# Altium PCB Mashiro FS (release).PcbDoc
Units mm, origin at the board's own origin, x right, y up, seen from the top; angles counter-clockwise.
Board outline 80 x 50 mm, 4 copper layers (Top Layer, Layer 1, Layer 2, Bottom Layer), stack 1.57 mm thick; 62 components, 49 nets, 197 pads, 898 vias.
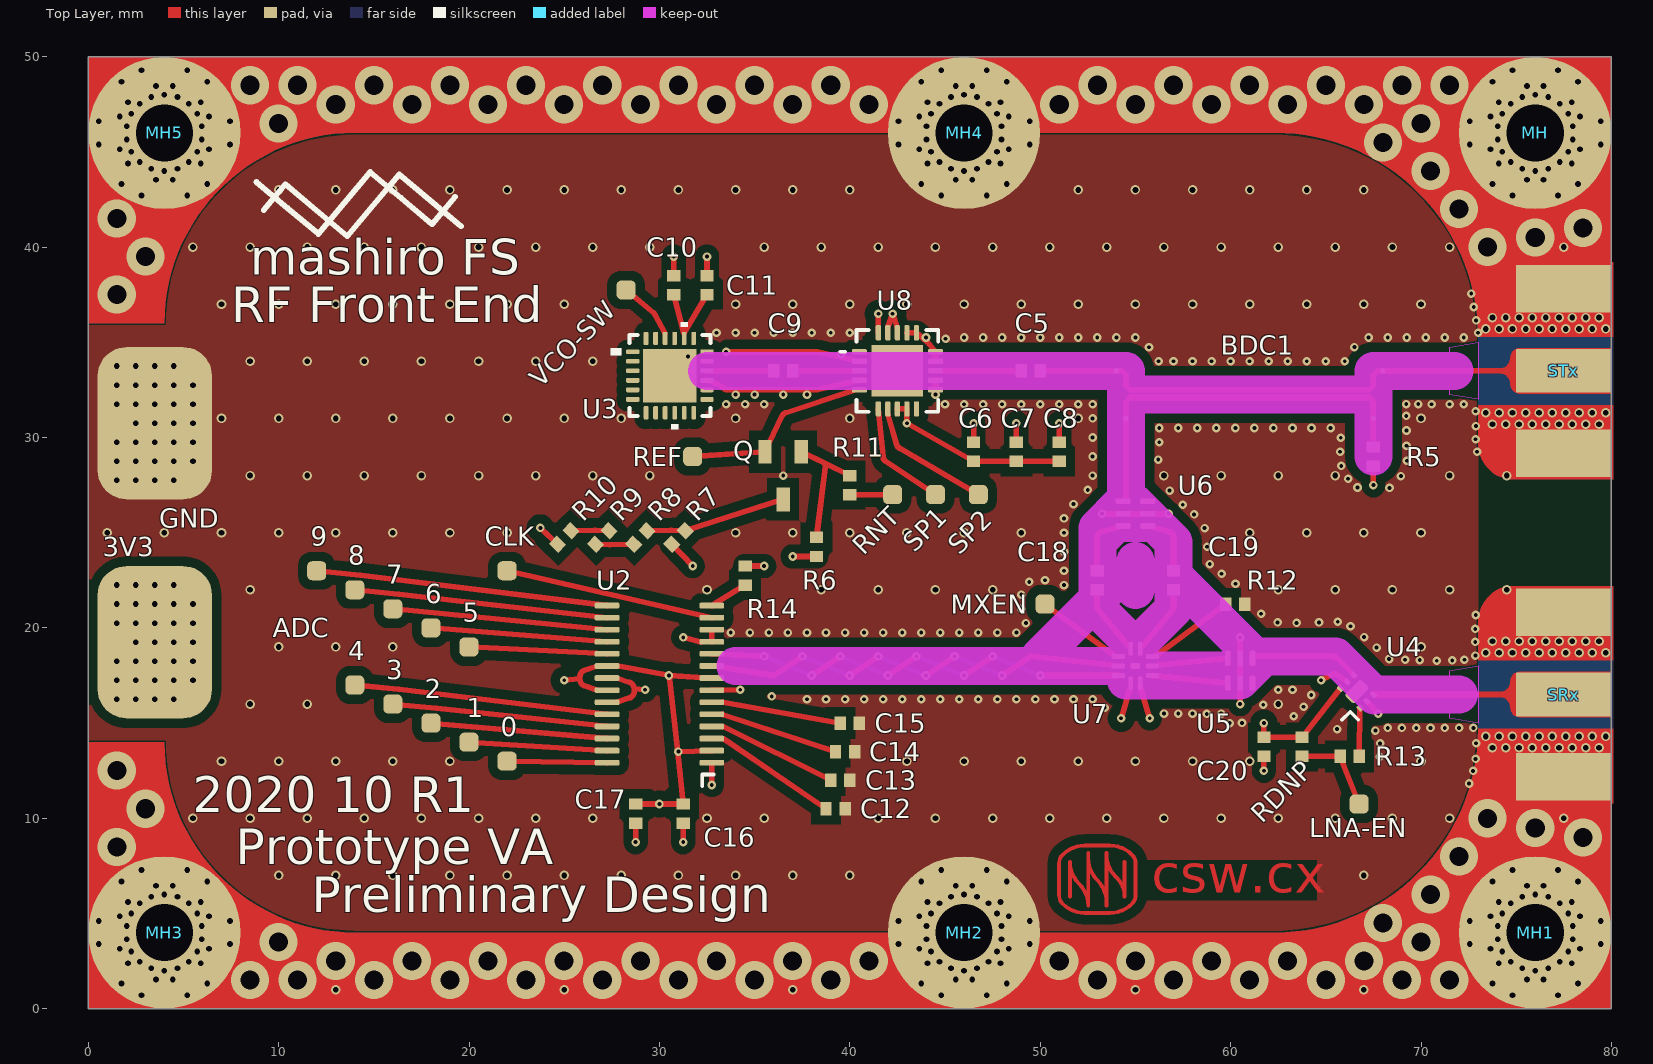
[diagram p0: Top Layer view]
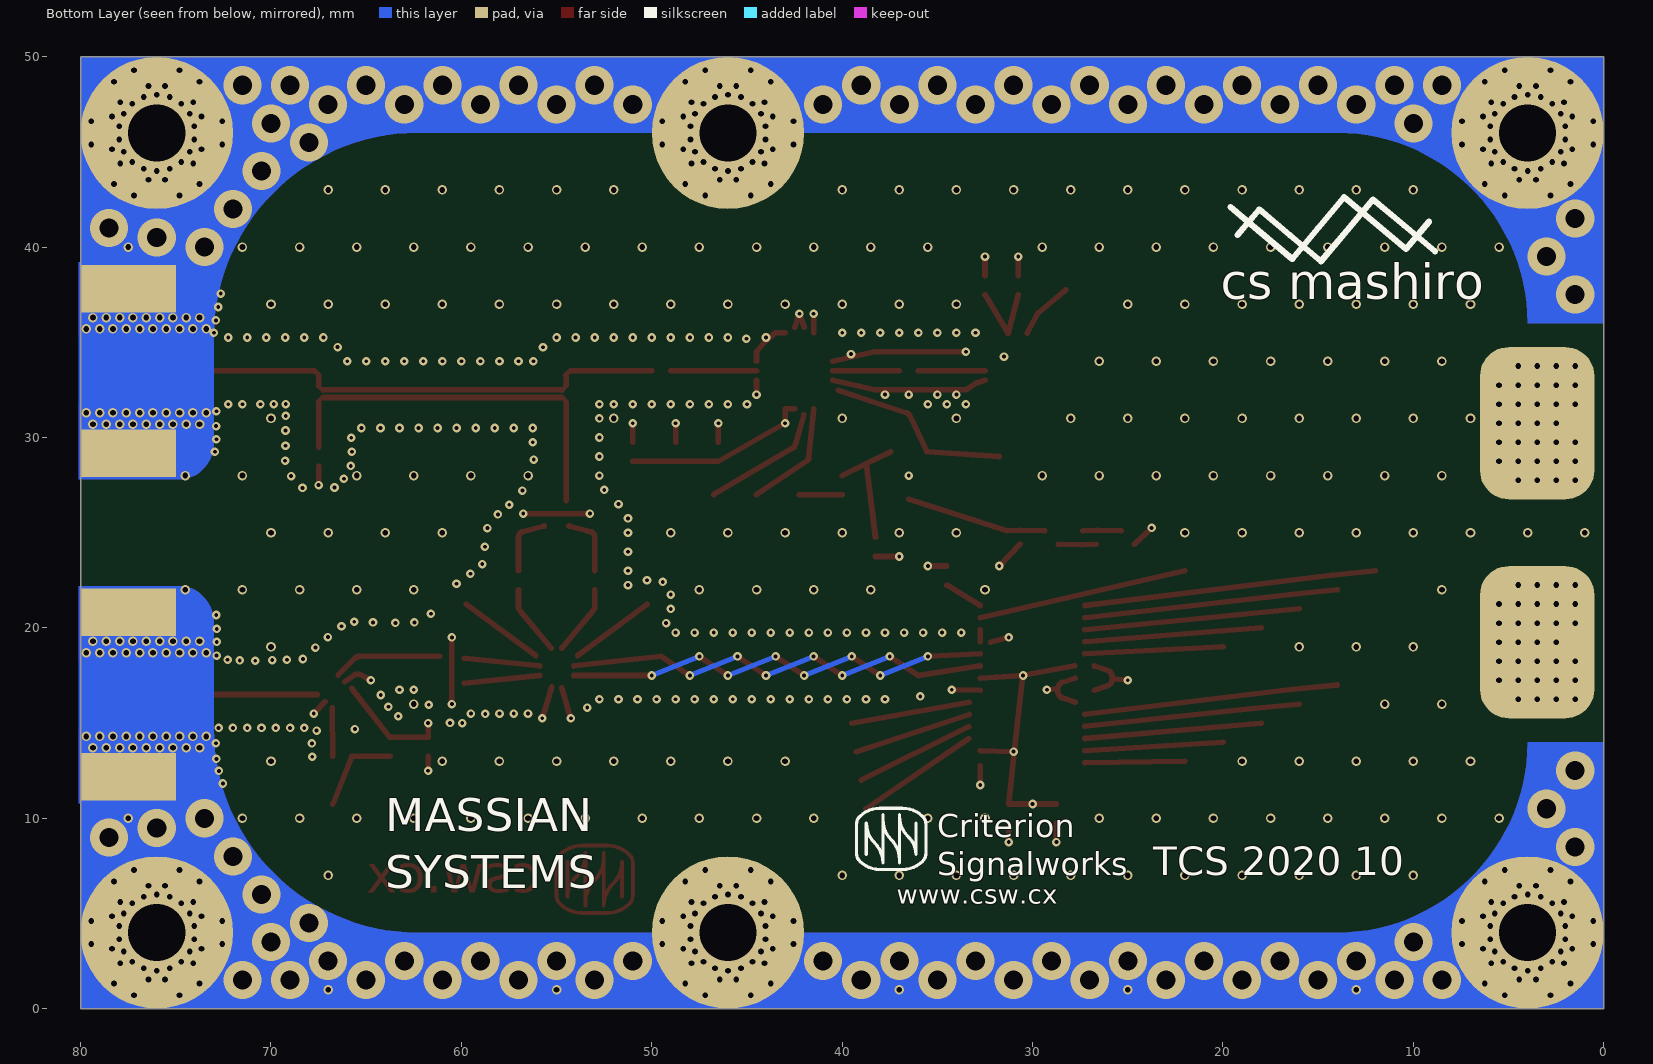
[diagram p1: Bottom Layer view, seen from below]
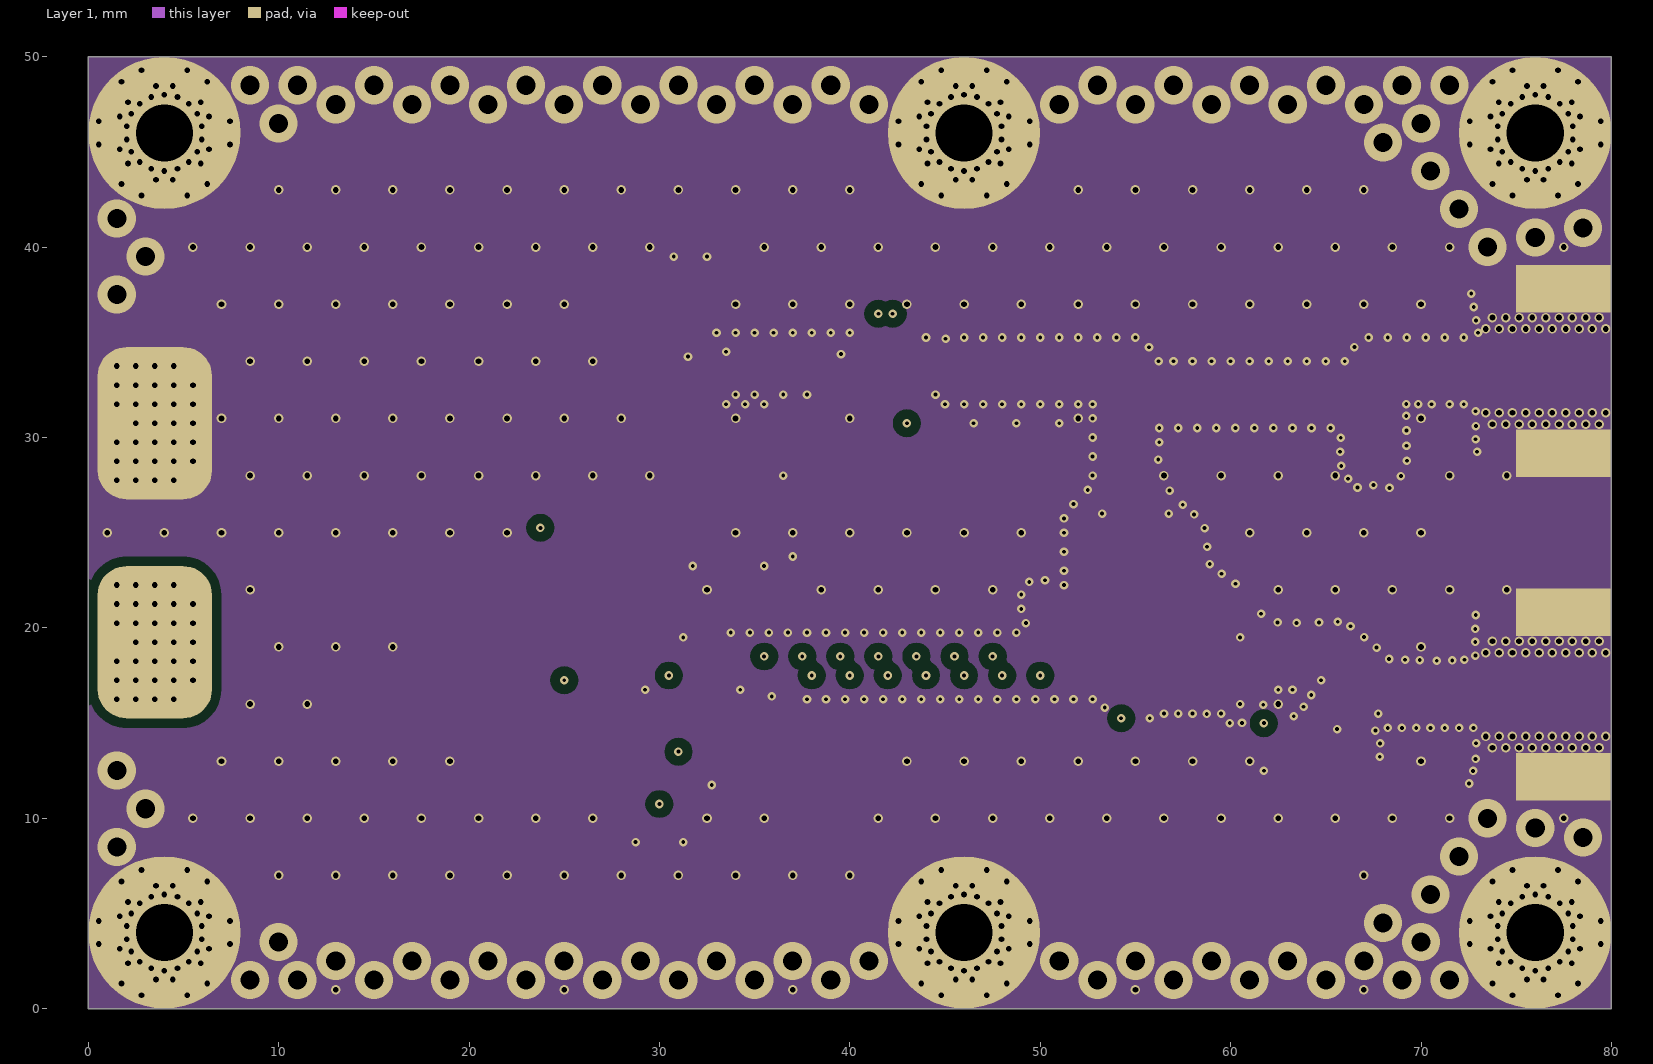
[diagram p2: Layer 1]
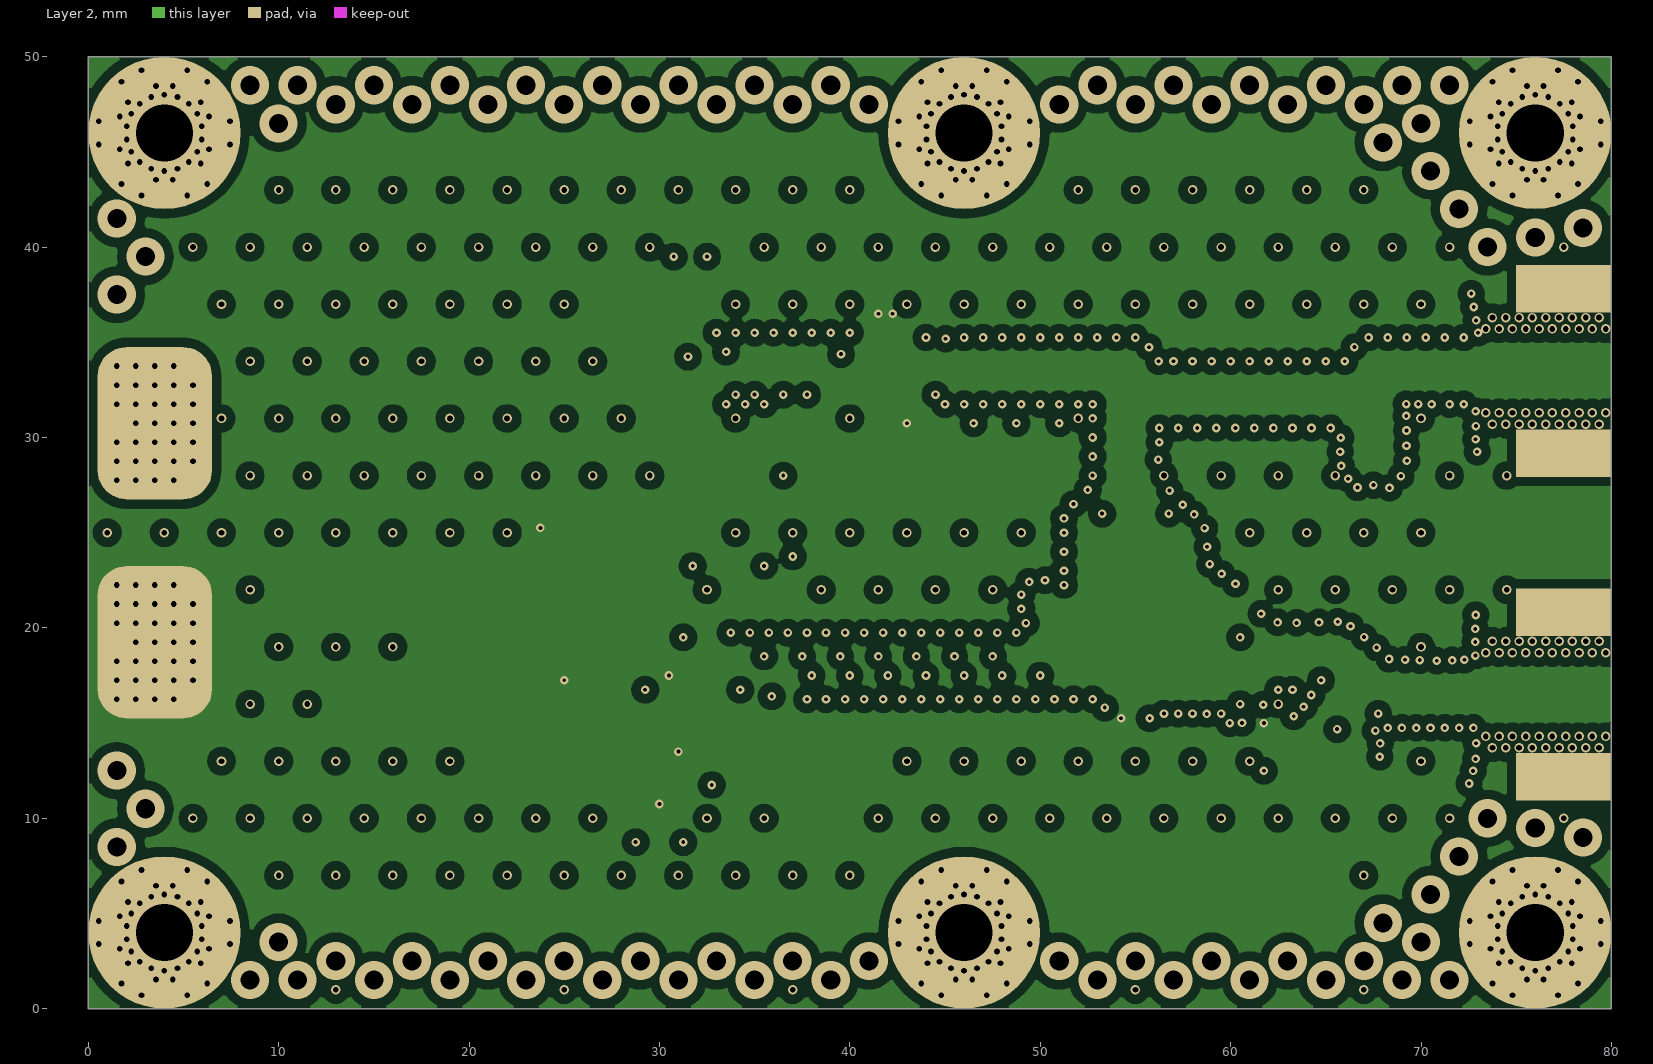
[diagram p3: Layer 2]

## Layer stack, top to bottom
Top Solder: solder mask 0.0254, SM-001, Dk 4
Top Layer: signal copper 0.035
Dielectric 2: prepreg 0.2, PP-006, Dk 4.1
Layer 1: signal copper 0.0175
Dielectric 1: core 1.065, Core-043, Dk 4.3
Layer 2: signal copper 0.0175
Dielectric 3: prepreg 0.2, PP-006, Dk 4.1
Bottom Layer: signal copper 0.035
Bottom Solder: solder mask 0.0254, SM-001, Dk 4

## Board outline
0,0 80,0 80,50 0,50

## Design rules (kind name [scope] priority, off if disabled: settings)
Clearance [All] p1: gap=0.127 ignorepadtopadclearanceinfootprint=FALSE except(0.09: Arc-Arc Arc-Track Track-Track Fill-Fill Fill-Poly Fill-Region Poly-Poly Poly-Region Region-Region; 0.5: Arc-Fill Arc-Poly Arc-Region Track-Fill Track-Poly Track-Region SMDPad-Fill SMDPad-Poly SMDPad-Region THPad-Fill THPad-Poly THPad-Region Via-Fill Via-Poly Via-Region)
HoleSize [All] p1: absolutevalues=TRUE maxlimit=6.3 minlimit=0.2 maxpercent=80.000 minpercent=20.000
MinimumAnnularRing [All] p1: minimumring=0.13
PlaneClearance [All] p1: clearance=0
PlaneConnect [All] p1: planeconnectstyle=Direct reliefexpansion=0.5 reliefentries=4 reliefconductorwidth=0.3 reliefairgap=0.3
PolygonConnect [All] p1: connectstyle=Direct reliefconductorwidth=0.3 reliefentries=4 polygonreliefangle="45 Angle" airgapwidth=0.3
RoutingVias [All] p1: holewidth=0.711 width=1.27 viastyle="Through Hole" minholewidth=0.711 minwidth=1.27 maxholewidth=0.711 maxwidth=1.27
SolderMaskExpansion [All] p1: expansion=0.102 istentingtop=FALSE
UnRoutedNet [All] p1: checkbadconnections=TRUE
Width [All] p1: maxlimit=50 minlimit=0.127 preferedwidth=0.254 toplayer_prefwidth=0.25 midlayer1_minwidth=0.254 midlayer1_maxwidth=0.254 midlayer2_minwidth=0.254 midlayer2_maxwidth=0.254 bottomlayer_prefwidth=0.25 minimp=50.000000 maximp=50.000000 favimp=50.000000
26 further rules are at their usual default settings.

## Components (designator, comment, footprint, x,y, rotation, side; value= is the part's Value field where it differs from the comment)
0 "CS-TP-1mm" CS-TP-1mm 22,13 r90 top (schematic designator ADC-D0)
1 "CS-TP-1mm" CS-TP-1mm 20,14 r90 top (schematic designator ADC-D1)
2 "CS-TP-1mm" CS-TP-1mm 18,15 r90 top (schematic designator ADC-D2)
3 "CS-TP-1mm" CS-TP-1mm 16,16 r90 top (schematic designator ADC-D3)
4 "CS-TP-1mm" CS-TP-1mm 14,17 r90 top (schematic designator ADC-D4)
5 "CS-TP-1mm" CS-TP-1mm 20,19 r90 top (schematic designator ADC-D5)
6 "CS-TP-1mm" CS-TP-1mm 18,20 r90 top (schematic designator ADC-D6)
7 "CS-TP-1mm" CS-TP-1mm 16,21 r90 top (schematic designator ADC-D7)
8 "CS-TP-1mm" CS-TP-1mm 14,22 r90 top (schematic designator ADC-D8)
9 "CS-TP-1mm" CS-TP-1mm 12,23 r90 top (schematic designator ADC-D9)
BDC1 "CS-RF-BDC-5.8" CS-RF-BDC01 54,33.5 r0 top net-tie
C5 "1nF" CS-0402! 49.5,33.5 r0 top
C6 "1uF" CS-0402! 46.5,29.25 r90 top
C7 "10nF" CS-0402! 48.75,29.25 r90 top
C8 "1nF" CS-0402! 51,29.25 r90 top
C9 "1nF" CS-0402! 36.5,33.5 r0 top
C10 "10nF" CS-0402! 30.75,38 r90 top
C11 "1uF" CS-0402! 32.5,38 r90 top
C12 "100nF" CS-0402! 39.25,10.5 r180 top
C13 "100nF" CS-0402! 39.5,12 r180 top
C14 "100nF" CS-0402! 39.75,13.5 r180 top
C15 "100nF" CS-0402! 40,15 r180 top
C16 "1uF" CS-0402! 31.25,10.25 r90 top
C17 "10nF" CS-0402! 28.75,10.25 r90 top
C18 "1nF" CS-0402! 53,22.5 r90 top
C19 "1nF" CS-0402! 57,22.5 r90 top
C20 "100nF" CS-0402! 61.75,13.75 r270 top
CLK "CS-TP-1mm" CS-TP-1mm 22,23 r90 top (schematic designator ADC-CLK)
LNA-EN "CS-TP-1mm" CS-TP-1mm 66.75,10.75 r90 top
MH "CS-MH-M3" CS-MH-M3 76,46 r0 top (schematic designator *?)
MH1 "CS-MH-M3" CS-MH-M3 76,4 r0 top (schematic designator *)
MH2 "CS-MH-M3" CS-MH-M3 46,4 r0 top (schematic designator *)
MH3 "CS-MH-M3" CS-MH-M3 4,4 r0 top (schematic designator *)
MH4 "CS-MH-M3" CS-MH-M3 46,46 r0 top (schematic designator *?)
MH5 "CS-MH-M3" CS-MH-M3 4,46 r0 top (schematic designator *?)
MXEN "CS-TP-1mm" CS-TP-1mm 50.25,21.25 r90 top (schematic designator MX-EN)
Q "DSS4240T" SOT-23-3 36.5,28 r90 top
R5 "50" CS-0402! 67.5,29 r270 top
R6 "100k" CS-0402! 38.25,24.25 r270 top
R7 "100k" CS-0402! 31,24.75 r225 top
R8 "10k" CS-0402! 29,24.75 r45 top
R9 "4.7k" CS-0402! 27,24.75 r45 top
R10 "1k" CS-0402! 25,24.75 r45 top
R11 "100" CS-0402! 40,27.5 r90 top
R12 "100" CS-0402! 60.25,21.25 r0 top
R13 "100" CS-0402! 66.25,13.25 r0 top
R14 "10k" CS-0402! 34.5,22.75 r90 top
RDNP "0" CS-0402! 63.75,13.75 r270 top
REF "CS-TP-1mm" CS-TP-1mm 31.75,29 r90 top (schematic designator PA-REF)
RNT "CS-TP-1mm" CS-TP-1mm 42.25,27 r90 top (schematic designator PA-RN-T)
SP1 "CS-TP-1mm" CS-TP-1mm 44.5,27 r90 top (schematic designator PA-SP1)
SP2 "CS-TP-1mm" CS-TP-1mm 46.75,27 r90 top (schematic designator PA-SP2)
SRx "CS-RF-SMA" CS-RF-SMA 77.5,16.5 r90 top
STx "CS-RF-SMA" CS-RF-SMA 77.5,33.5 r90 top
U2 "MAX1426" SSOP-28 30,17.047 r180 top
U3 "HMC431LP4E" "QFN-24 (HMC431LP4)" 30.55,33.25 r0 top
U4 "SKY65404" QFN-6 66.634,16.659 r45 top
U5 "HHM1595A1" 0805-6 60.5,17.75 r270 top
U6 "HHM1595A1" 0805-6 55,26 r0 top
U7 "LTC5562" "QFN-10 (Legacy LTC)" 55,18 r270 top
U8 "SE5004L" QFN-20 42.5,33.5 r270 top
VCO-SW "CS-TP-1mm" CS-TP-1mm 28.25,37.75 r90 top

## Footprints (in the part's own frame and the unit in brackets; to place one, negate y for a bottom-side part, rotate by r counter-clockwise, add the part's x,y. Pads: shape width x height; smd on the part's side, far side on the other; paste and mask are expansions set on the pad)
0805-6 [mm]
  rrect50% 0.8x0.3 smd: 1(-0.65,0.65) 2(-0.65,0) 3(-0.65,-0.65) 4(0.65,-0.65) 5(0.65,0) 6(0.65,0.65)
  body extent -0.65,-0.85 0.6,0.9, height 1
CS-0402! [mm] "1005(0402) Medium/perfect density, cap varient for general purpose"
  rect 0.6x0.7 smd: 1(-0.5,0) 2(0.5,0)
  body extent -0.5,-0.25 0.5,0.25, height 0.4
CS-MH-M3 [mm]
  round 8 hole 3: 1(0,0)
CS-RF-BDC01 [mm] "Backward directional coupler, 5.8GHz, 50 ohms, for JLC7628 stackup"
  round 0.293 smd paste-10 mask+0.102: 1(0,0) 2(14,0) 3(13.5,-2.5) 4(0.5,-2.5)
  Top Layer region: 0.75,-1.546 0.647,-1.546 0.647,-1.65 0.646,-1.65 0.355,-1.65 0.354,-1.649 0.354,-1.588 0.689,-1.253 0.75,-1.253 0.75,-1.4
  Top Layer region: 13.25,-1.546 13.353,-1.546 13.353,-1.65 13.354,-1.65 13.645,-1.65 13.646,-1.649 13.646,-1.588 13.311,-1.253 13.25,-1.253 13.25,-1.4
  Top Layer region: 0.75,-0.854 0.647,-0.854 0.647,-0.75 0.646,-0.75 0.355,-0.75 0.354,-0.751 0.354,-0.812 0.689,-1.147 0.75,-1.147 0.75,-1
  Top Layer region: 13.25,-0.854 13.353,-0.854 13.353,-0.75 13.354,-0.75 13.645,-0.75 13.646,-0.751 13.646,-0.812 13.311,-1.147 13.25,-1.147 13.25,-1
  Top Layer region: 0.354,-0.25 0.354,-0.147 0.25,-0.147 0.25,-0.146 0.25,0.145 0.251,0.146 0.312,0.146 0.647,-0.189 0.647,-0.25 0.5,-0.25
  Top Layer region: 13.646,-0.25 13.646,-0.147 13.75,-0.147 13.75,-0.146 13.75,0.145 13.749,0.146 13.688,0.146 13.353,-0.189 13.353,-0.25 13.5,-0.25
  Top Layer lines w0.293: 0,0 0.25,0 ; 0.5,-2.5 0.5,-1.65 ; 0.5,-0.75 0.5,-0.5 0.5,-0.25 ; 0.75,-1.4 1,-1.4 13,-1.4 13.25,-1.4 ; 0.75,-1 1,-1 13,-1 13.25,-1 ; 13.5,-2.5 13.5,-1.65 ; 13.5,-0.75 13.5,-0.5 13.5,-0.25 ; 13.75,0 14,0
CS-RF-SMA [mm]
  rect 2.3x5 smd paste-10: 1(0,0)
  rect 2.5x5 all layers, no hole: 2(-4.318,0) 2(4.318,0)
  Top Layer region: 1.8,-2.6 5.7,-2.6 5.7,2.693 5.57,3.346 5.2,3.9 5.2,3.9 4.535,4.344 3.751,4.5 3.751,4.5 1.8,4.5
  Top Layer region: 0,3.6 0,-2.5 -1.2,-2.5 -1.2,2.3 -1.162,2.491 -1.054,2.654 -0.891,2.762 -0.7,2.8 -0.7,2.8 -0.483,2.843 -0.299,2.966 -0.176,3.15 -0.133,3.367 -0.133,3.367 -0.133,3.6
  Top Layer region: 0,3.6 0,-2.5 1.2,-2.5 1.2,2.3 1.162,2.491 1.054,2.654 0.891,2.762 0.7,2.8 0.7,2.8 0.483,2.843 0.299,2.966 0.176,3.15 0.133,3.367 0.133,3.367 0.133,3.6
  Top Layer region: -1.8,-2.6 -5.7,-2.6 -5.7,2.693 -5.57,3.346 -5.2,3.9 -5.2,3.9 -4.535,4.344 -3.751,4.5 -3.751,4.5 -1.8,4.5
  Top Layer lines w0.293: 0,4 0,2.4
  Bottom Layer region: -1.8,-2.6 -5.7,-2.6 -5.7,2.693 -5.57,3.346 -5.2,3.9 -5.2,3.9 -4.535,4.344 -3.751,4.5 -3.751,4.5 -1.8,4.5
  Bottom Layer region: 1.8,-2.6 5.7,-2.6 5.7,2.693 5.57,3.346 5.2,3.9 5.2,3.9 4.535,4.344 3.751,4.5 3.751,4.5 1.8,4.5
  Bottom Layer region: -1.8,4.5 1.8,4.5 1.8,-2.6 -1.8,-2.6
  body extent -4.76,-12.24 4.76,2.03, height 4.32
CS-TP-1mm [mm] "Breakout pad"
  rrect50% 1x1 smd paste-2: 1(0,0)
QFN-6 [mm]
  rrect50% 0.25x0.35 smd: 1(-0.5,-0.725) 2(0,-0.725) 3(0.5,-0.725) 4(0.5,0.725) 5(0,0.725) 6(-0.5,0.725)
  rrect50% 1.2x0.7 smd: 7(0,0)
  silkscreen extent -1.6,-1.1 -1,-0.5, body extent -0.7,-0.6 0.7,0.6, height 0.7
"QFN-10 (Legacy LTC)" [mm]
  rrect50% 0.7x0.25 smd: 1(-0.9,0.25) 2(-0.9,-0.25) 6(0.9,-0.25) 7(0.9,0.25)
  rrect50% 0.25x0.7 smd: 3(-0.5,-0.9) 4(0,-0.9) 5(0.5,-0.9) 8(0.5,0.9) 9(0,0.9) 10(-0.5,0.9)
  rrect50% 0.3x0.5 smd: 11(0,0)
  body extent -1,-1 1,1, height 0.5
QFN-20 [mm]
  rrect50% 0.28x0.796 smd: 1(-1,-2) 2(-0.5,-2) 3(0,-2) 4(0.5,-2) 5(1,-2) 11(1,2) 12(0.5,2) 13(0,2) 14(-0.5,2) 15(-1,2)
  rrect50% 0.796x0.28 smd: 6(2,-1) 7(2,-0.5) 8(2,0) 9(2,0.5) 10(2,1) 16(-2,1) 17(-2,0.5) 18(-2,0) 19(-2,-0.5) 20(-2,-1)
  rect 2.7x2.7 smd: 21(0,0)
  silkscreen extent -2.15,-3 2.15,2.15, body extent -1.75,-1.75 1.75,1.75, height 0.4
"QFN-24 (HMC431LP4)" [mm]
  rrect50% 0.7x0.25 smd: 1(-1.95,1.25) 2(-1.95,0.75) 3(-1.95,0.25) 4(-1.95,-0.25) 5(-1.95,-0.75) 6(-1.95,-1.25) 13(1.95,-1.25) 14(1.95,-0.75) 15(1.95,-0.25) 16(1.95,0.25) 17(1.95,0.75) 18(1.95,1.25)
  rrect50% 0.25x0.7 smd: 7(-1.25,-1.95) 8(-0.75,-1.95) 9(-0.25,-1.95) 10(0.25,-1.95) 11(0.75,-1.95) 12(1.25,-1.95) 19(1.25,1.95) 20(0.75,1.95) 21(0.25,1.95) 22(-0.25,1.95) 23(-0.75,1.95) 24(-1.25,1.95)
  rect 2.8x2.8 smd: 25(0,0)
  silkscreen extent -3.11,-2.81 2.13,2.81, body extent -1.75,-1.75 1.75,1.75, height 0.4
SOT-23-3 [mm]
  rect 1.25x0.7 smd: 1(1.25,-0.95) 2(1.25,0.95) 3(-1.25,0)
  body extent -0.69,-1.5 0.69,1.5, height 1
SSOP-28 [mm]
  rrect50% 1.3x0.3 smd: 1(-2.75,4.128) 2(-2.75,3.492) 3(-2.75,2.857) 4(-2.75,2.222) 5(-2.75,1.587) 6(-2.75,0.952) 7(-2.75,0.317) 8(-2.75,-0.318) 9(-2.75,-0.953) 10(-2.75,-1.588) 11(-2.75,-2.222) 12(-2.75,-2.858) 13(-2.75,-3.492) 14(-2.75,-4.127) 15(2.75,-4.127) 16(2.75,-3.492) 17(2.75,-2.858) 18(2.75,-2.222) 19(2.75,-1.587) 20(2.75,-0.952) 21(2.75,-0.317) 22(2.75,0.318) 23(2.75,0.953) 24(2.75,1.588) 25(2.75,2.223) 26(2.75,2.858) 27(2.75,3.492) 28(2.75,4.127)
  silkscreen extent -2.85,4.75 -2.25,5.35, body extent -2.5,-4.5 2.5,4.5, height 0.5

## Part data
C5 C6 C7 C8 C9 C10 C11 C12 C13 C14 C15 C16 C17 C18 C19 C20: library part C0402!
R5 R6 R7 R8 R9 R10 R11 R12 R13 R14 RDNP: library part R0402!
U3: Built_By=EMA_UL_Team, Copyright="Copyright (C) 2018 Accelerated Designs. All rights reserved", Manufacturer_Part_Number=HMC431LP4E, RefDes=RefDes, SourceLibrary=Analog_2015-12-15, Type=DEV, Vendor="Analog Devices Inc"

## Free pads (board coordinates)
  rrect50% 6x8 all layers, no hole: 5(3.5,19.25) 5(3.5,30.75)

## Via types
v1: diameter 0.5, hole 0.3, Top Layer to Bottom Layer, 328 vias
v2: diameter 0.45, hole 0.2, Top Layer to Bottom Layer, tented both sides, 247 vias
v3: diameter 0.5, hole 0.3, Top Layer to Bottom Layer, tented both sides, 245 vias
v4: diameter 2, hole 1, Top Layer to Bottom Layer, tented both sides, 78 vias

## Nets (pads, with @x,y where several pads share a name; then routed paths per layer and width w, separated by ;. In a path a pad name is that pad's centre, name@x,y a point inside that pad or via, vN(x,y) a via of type N, cw(c..) or ccw(c..) an arc to the next point about the centre after c; other vN are vias at no path point)
3V0A: C10.1 C11.1 U3.20 | length 4.4
  Top Layer w0.293: C10.1 31.288,35.48 U3.20@31.29,35.473 ; U3.20@31.299,35.483 C11.1
3V3A: C6.1 C7.1 C8.1 C16.2 C17.2 C20.1 pad.5@3.5,19.25 R10.1 RDNP.1 U2.2 U2.8 U2.20 U2.22 U4.6 U7.6 U8.8 U8.9 U8.18 U8.19 U8.20 | length 40.6
  Top Layer w0.293: v2(23.75,25.25) R10.1 ; v2(25,17.25) 25.789,17.318 ; U2.22@26.75,16.73 26.064,16.959 cw(c26.175,17.29) 25.826,17.29 25.826,17.44 cw(c26.175,17.44) 26.065,17.771 U2.20@26.75,18 ; U2.20@27.784,18.015 30.482,17.503 ccw(c30.536,17.792) v2@30.519,17.499 ; C17.2 C16.2 v2@30.953,13.495 ; U2.2 v2@30.953,13.495 ; U2.8 v2@30.519,17.499 ; U8.20 v2(41.5,36.5) ; U8.19@41.994,35.796 v2(42.25,36.5) U8.18@42.482,35.796 ; U8.8 U8.9 v2(43,30.75) C6.1 C7.1 C8.1 ; v2(54.25,15.25) U7.6@54.725,16.855 ; v2(61.75,15) C20.1 RDNP.1 U4.6 ; v2@30.519,17.499 v2@30.953,13.495
  other v2: 30,10.75 31,13.5 30.5,17.5
  other v3: 1.5,16.25 2.5,16.25 3.5,16.25 4.5,16.25 1.5,17.25 2.5,17.25 3.5,17.25 4.5,17.25 5.5,17.25 1.5,18.25 2.5,18.25 3.5,18.25 4.5,18.25 5.5,18.25 2.5,19.25 3.5,19.25 4.5,19.25 5.5,19.25 1.5,20.25 2.5,20.25 3.5,20.25 4.5,20.25 5.5,20.25 1.5,21.25 2.5,21.25 3.5,21.25 4.5,21.25 5.5,21.25 1.5,22.25 2.5,22.25 3.5,22.25 4.5,22.25
A-PA-REFN: Q.3 R7.1 R8.2 | length 7.4
  Top Layer w0.293: R8.2 30.605,25.13 cw(c30.611,24.856) 30.621,25.13 R7.1 Q.3
A-PA-REFS: Q.2 REF.1 U8.5 | length 9.9
  Top Layer w0.293: REF.1 Q.2 36.446,31.137 cw(c36.711,31.011) 36.619,31.29 U8.5@40.212,32.489
A-VCO-SW: U3.22 VCO-SW.1 | length 3.1
  Top Layer w0.293: VCO-SW.1 29.704,36.538 cw(c29.517,36.313) 29.778,36.446 U3.22@30.281,35.473
BB-RN: U2.10 U7.5 | length 23
  Top Layer w0.293: U2.10 v2(35.5,18.5) ; v2(38,17.5) v2(39.5,18.5) ; v2(42,17.5) v2(43.5,18.5) ; v2(46,17.5) v2(47.5,18.5) ; v2(50,17.5) U7.5
  Bottom Layer w0.293: v2(35.5,18.5) v2(38,17.5) ; v2(39.5,18.5) v2(42,17.5) ; v2(43.5,18.5) v2(46,17.5) ; v2(47.5,18.5) v2(50,17.5)
BB-RP: U2.9 U7.4 | length 23.2
  Top Layer w0.293: U2.9 36,17.5 v2(37.5,18.5) ; v2(40,17.5) v2(41.5,18.5) ; v2(44,17.5) v2(45.5,18.5) ; v2(48,17.5) 49.5,18.5 U7.4
  Bottom Layer w0.293: v2(37.5,18.5) v2(40,17.5) ; v2(41.5,18.5) v2(44,17.5) ; v2(45.5,18.5) v2(48,17.5)
D-LNA-EN: LNA-EN.1 R13.1 RDNP.2 | length 4.7
  Top Layer w0.293: RDNP.2 R13.1 LNA-EN.1
D-PA-RN: R11.1 RNT.1 | length 2.3
  Top Layer w0.293: R11.1 RNT.1
GND: C6.2 C7.2 C8.2 C10.2 C11.2 C12.1 C13.1 C14.1 C15.1 C16.1 C17.1 C20.2 MH1.1 MH2.1 MH3.1 MH4.1 MH5.1 MH.1 pad.5@3.5,30.75 R5.2 R6.2 R7.2 R12.2 R14.2 SRx.2 STx.2 U2.1 U2.7 U2.11 U2.12 U2.21 U2.23 U3.15 U3.25 U4.2 U4.5 U5.2 U5.5 U6.2 U6.5 U7.7 U8.2 U8.4 U8.11 U8.12 U8.14 U8.15 U8.16 U8.17 | length 48.9
  Top Layer w0.293: U2.23@27.75,16.095 28.436,16.324 ccw(c28.325,16.655) 28.674,16.655 28.674,16.805 ; U2.21@27.75,17.365 28.435,17.136 cw(c28.325,16.805) 28.674,16.805 ; v2(28.75,8.75) C17.1 ; v2(29.25,16.75) 28.674,16.805 ; R7.2 v2(31.75,23.25) ; C10.2 v2(30.75,39.5) ; v2(31.25,8.75) C16.1 ; v2(31.25,19.5) U2.11@32.207,19.253 ; U3.15 32.884,32.885 cw(c32.788,32.563) 32.972,32.844 33.427,32.547 ; C11.2 v2(32.5,39.5) ; v2(32.75,11.75) 32.75,12.75 ; U2.7 v2(34.25,16.75) ; U2.11 U2.12 ; 33.428,32.547 ccw(c33.587,32.793) 33.587,32.5 38.218,32.5 ccw(c38.218,32.793) 38.282,32.507 U8.4 ; v2@33.587,34.5 38.218,34.5 ; R14.2 v2(35.5,23.25) ; v2(37,23.75) R6.2 ; 38.282,34.493 U8.2 ; U8.17 U8.16 44.026,35.06 cw(c43.85,34.85) 44.06,35.025 U8.15 U8.14 ; U8.11 U8.12 ; C6.2 v2(46.5,30.75) ; C7.2 v2(48.75,30.75) ; C8.2 v2(51,30.75) ; v2(53.25,26) U6.2 U6.5 v2(56.75,26) ; U7.7@55.26,16.906 v2(55.75,15.25) ; v2(60.5,16) U5.5 U5.2 v2(60.5,19.5) ; v2(61.75,12.5) C20.2 ; v2(64.75,17.25) 65.325,17.543 cw(c65.458,17.281) 65.628,17.52 U4.5 ; U4.2@67.154,16.131 v2(67.75,15.5) ; v2(67.5,27.5) R5.2
  other v1: 2.803,0.711 5.197,0.711 44.803,0.711 47.197,0.711 74.803,0.711 77.197,0.711 1.75,1.319 6.25,1.319 43.75,1.319 48.25,1.319 73.75,1.319 78.25,1.319 3.566,1.538 4.434,1.538 45.566,1.538 46.434,1.538 75.566,1.538 76.434,1.538 4,2 46,2 76,2 3.316,2.121 4.684,2.121 45.316,2.121 46.684,2.121 75.316,2.121 76.684,2.121 2.085,2.393 5.915,2.393 44.085,2.393 47.915,2.393 74.085,2.393 77.915,2.393 2.714,2.468 5.286,2.468 44.714,2.468 47.286,2.468 74.714,2.468 77.286,2.468 2.268,3 5.732,3 44.268,3 47.732,3 74.268,3 77.732,3 1.651,3.145 6.349,3.145 43.651,3.145 48.349,3.145 73.651,3.145 78.349,3.145 0.553,3.392 7.447,3.392 42.553,3.392 49.447,3.392 72.553,3.392 79.447,3.392 2.03,3.653 5.97,3.653 44.03,3.653 47.97,3.653 74.03,3.653 77.97,3.653 2.03,4.347 5.97,4.347 44.03,4.347 47.97,4.347 74.03,4.347 77.97,4.347 0.553,4.608 7.447,4.608 42.553,4.608 49.447,4.608 72.553,4.608 79.447,4.608 1.651,4.855 6.349,4.855 43.651,4.855 48.349,4.855 73.651,4.855 78.349,4.855 2.268,5 5.732,5 44.268,5 47.732,5 74.268,5 77.732,5 2.714,5.532 5.286,5.532 44.714,5.532 47.286,5.532 74.714,5.532 77.286,5.532 2.085,5.607 5.915,5.607 44.085,5.607 47.915,5.607 74.085,5.607 77.915,5.607 3.316,5.879 4.684,5.879 45.316,5.879 46.684,5.879 75.316,5.879 76.684,5.879 4,6 46,6 76,6 3.566,6.462 4.434,6.462 45.566,6.462 46.434,6.462 75.566,6.462 76.434,6.462 1.75,6.681 6.25,6.681 43.75,6.681 48.25,6.681 73.75,6.681 78.25,6.681 2.803,7.289 5.197,7.289 44.803,7.289 47.197,7.289 74.803,7.289 77.197,7.289 73.75,13.7 74.45,13.7 75.15,13.7 75.85,13.7 76.55,13.7 77.25,13.7 77.95,13.7 78.65,13.7 79.35,13.7 73.4,14.3 74.1,14.3 74.8,14.3 75.5,14.3 76.2,14.3 76.9,14.3 77.6,14.3 78.3,14.3 79,14.3 79.7,14.3 73.4,18.7 74.1,18.7 74.8,18.7 75.5,18.7 76.2,18.7 76.9,18.7 77.6,18.7 78.3,18.7 79,18.7 79.7,18.7 73.75,19.3 74.45,19.3 75.15,19.3 75.85,19.3 76.55,19.3 77.25,19.3 77.95,19.3 78.65,19.3 79.35,19.3 73.75,30.7 74.45,30.7 75.15,30.7 75.85,30.7 76.55,30.7 77.25,30.7 77.95,30.7 78.65,30.7 79.35,30.7 73.4,31.3 74.1,31.3 74.8,31.3 75.5,31.3 76.2,31.3 76.9,31.3 77.6,31.3 78.3,31.3 79,31.3 79.7,31.3 73.4,35.7 74.1,35.7 74.8,35.7 75.5,35.7 76.2,35.7 76.9,35.7 77.6,35.7 78.3,35.7 79,35.7 79.7,35.7 73.75,36.3 74.45,36.3 75.15,36.3 75.85,36.3 76.55,36.3 77.25,36.3 77.95,36.3 78.65,36.3 79.35,36.3 2.803,42.711 5.197,42.711 44.803,42.711 47.197,42.711 74.803,42.711 77.197,42.711 1.75,43.319 6.25,43.319 43.75,43.319 48.25,43.319 73.75,43.319 78.25,43.319 3.566,43.538 4.434,43.538 45.566,43.538 46.434,43.538 75.566,43.538 76.434,43.538 4,44 46,44 76,44 3.316,44.121 4.684,44.121 45.316,44.121 46.684,44.121 75.316,44.121 76.684,44.121 2.085,44.393 5.915,44.393 44.085,44.393 47.915,44.393 74.085,44.393 77.915,44.393 2.714,44.468 5.286,44.468 44.714,44.468 47.286,44.468 74.714,44.468 77.286,44.468 2.268,45 5.732,45 44.268,45 47.732,45 74.268,45 77.732,45 1.651,45.145 6.349,45.145 43.651,45.145 48.349,45.145 73.651,45.145 78.349,45.145 0.553,45.392 7.447,45.392 42.553,45.392 49.447,45.392 72.553,45.392 79.447,45.392 2.03,45.653 5.97,45.653 44.03,45.653 47.97,45.653 74.03,45.653 77.97,45.653 2.03,46.347 5.97,46.347 44.03,46.347 47.97,46.347 74.03,46.347 77.97,46.347 0.553,46.608 7.447,46.608 42.553,46.608 49.447,46.608 72.553,46.608 79.447,46.608 1.651,46.855 6.349,46.855 43.651,46.855 48.349,46.855 73.651,46.855 78.349,46.855 2.268,47 5.732,47 44.268,47 47.732,47 74.268,47 77.732,47 2.714,47.532 5.286,47.532 44.714,47.532 47.286,47.532 74.714,47.532 77.286,47.532 2.085,47.607 5.915,47.607 44.085,47.607 47.915,47.607 74.085,47.607 77.915,47.607 3.316,47.879 4.684,47.879 45.316,47.879 46.684,47.879 75.316,47.879 76.684,47.879 4,48 46,48 76,48 3.566,48.462 4.434,48.462 45.566,48.462 46.434,48.462 75.566,48.462 76.434,48.462 1.75,48.681 6.25,48.681 43.75,48.681 48.25,48.681 73.75,48.681 78.25,48.681 2.803,49.289 5.197,49.289 44.803,49.289 47.197,49.289 74.803,49.289 77.197,49.289
  other v2: 72.523,11.826 72.736,12.49 72.869,13.119 67.837,13.23 67.851,13.936 72.892,13.943 67.603,14.603 65.593,14.683 68.25,14.75 69,14.75 69.75,14.75 70.5,14.75 71.25,14.75 72,14.75 72.75,14.75 59.951,15 60.597,15.009 63.315,15.363 58.75,15.48 56.5,15.5 57.25,15.5 58,15.5 59.5,15.5 53.394,15.815 63.833,15.857 61.715,15.963 37.75,16.25 38.75,16.25 39.75,16.25 40.75,16.25 41.75,16.25 42.75,16.25 43.75,16.25 44.75,16.25 45.75,16.25 46.75,16.25 47.75,16.25 48.75,16.25 49.75,16.25 50.75,16.25 51.75,16.25 52.75,16.25 35.9,16.403 64.24,16.474 62.5,16.75 63.25,16.75 70.832,18.277 69.937,18.307 71.637,18.292 69.161,18.322 72.278,18.322 68.326,18.367 72.86,18.546 67.67,18.963 72.845,19.262 67.014,19.515 33.75,19.75 34.75,19.75 35.75,19.75 36.75,19.75 37.75,19.75 38.75,19.75 39.75,19.75 40.75,19.75 41.75,19.75 42.75,19.75 43.75,19.75 44.75,19.75 45.75,19.75 46.75,19.75 47.75,19.75 48.75,19.75 72.845,19.948 66.298,20.082 49.25,20.25 63.464,20.261 62.465,20.291 64.643,20.291 65.627,20.321 72.875,20.678 61.6,20.738 49,21 49,21.75 51.25,22.25 60.258,22.319 49.424,22.418 50.25,22.5 59.527,22.841 51.25,23 58.901,23.348 51.25,24 58.767,24.258 51.25,25 58.633,25.242 51.25,25.75 58.081,25.958 57.484,26.465 51.75,26.5 56.798,27.21 52.5,27.25 66.665,27.373 68.344,27.354 66.172,27.829 68.947,27.975 36.5,28 52.75,28 65.807,28.505 69.257,28.778 56.202,28.836 52.75,29 65.75,29.25 72.948,29.246 69.239,29.563 56.25,29.75 72.87,29.909 65.788,29.983 52.75,30 69.239,30.367 56.25,30.5 57.25,30.5 58.25,30.5 59.25,30.5 60.25,30.5 61.25,30.5 62.25,30.5 63.25,30.5 64.25,30.5 65.25,30.5 72.882,30.599 52.75,31 69.221,31.133 72.87,31.379 70.555,31.743 33.5,31.75 34.5,31.75 35.5,31.75 45,31.75 46,31.75 47,31.75 48,31.75 49,31.75 50,31.75 51,31.75 52,31.75 52.75,31.75 69.221,31.754 69.853,31.756 71.5,31.75 72.25,31.75 34,32.25 35,32.25 36.5,32.25 37.75,32.25 44.5,32.25 56.219,34.003 57,34 58,34 59,34 60,34 61,34 62,34 63,34 64,34 65,34 66,34 31.5,34.25 39.537,34.382 33.5,34.5 55.716,34.741 66.5,34.75 45.033,35.19 44,35.25 46,35.25 47,35.25 48,35.25 49,35.25 50,35.25 51,35.25 52,35.25 53,35.25 54,35.25 55,35.25 67.25,35.25 68.25,35.25 69.25,35.25 70.25,35.25 71.25,35.25 72.25,35.25 33,35.5 34,35.5 35,35.5 36,35.5 37,35.5 38,35.5 39,35.5 40,35.5 73,35.5 72.895,36.151 72.765,36.853 72.635,37.555
  other v3: 13,1 25,1 37,1 55,1 67,1 10,7 13,7 16,7 19,7 22,7 25,7 28,7 31,7 34,7 37,7 40,7 67,7 5.5,10 8.5,10 11.5,10 14.5,10 17.5,10 20.5,10 23.5,10 26.5,10 32.5,10 35.5,10 41.5,10 44.5,10 47.5,10 50.5,10 53.5,10 56.5,10 59.5,10 62.5,10 65.5,10 68.5,10 71.5,10 77.5,10 7,13 10,13 13,13 16,13 19,13 43,13 46,13 49,13 52,13 55,13 58,13 61,13 70,13 8.5,16 11.5,16 62.5,16 10,19 13,19 16,19 70,19 8.5,22 32.5,22 38.5,22 41.5,22 44.5,22 47.5,22 62.5,22 65.5,22 68.5,22 71.5,22 74.5,22 1,25 4,25 7,25 10,25 13,25 16,25 19,25 22,25 34,25 37,25 40,25 43,25 46,25 49,25 61,25 64,25 67,25 70,25 1.5,27.75 2.5,27.75 3.5,27.75 4.5,27.75 8.5,28 11.5,28 14.5,28 17.5,28 20.5,28 23.5,28 26.5,28 29.5,28 56.5,28 59.5,28 62.5,28 65.5,28 71.5,28 74.5,28 1.5,28.75 2.5,28.75 3.5,28.75 4.5,28.75 5.5,28.75 1.5,29.75 2.5,29.75 3.5,29.75 4.5,29.75 5.5,29.75 2.5,30.75 3.5,30.75 4.5,30.75 5.5,30.75 7,31 10,31 13,31 16,31 19,31 22,31 25,31 28,31 34,31 40,31 52,31 70,31 1.5,31.75 2.5,31.75 3.5,31.75 4.5,31.75 5.5,31.75 1.5,32.75 2.5,32.75 3.5,32.75 4.5,32.75 5.5,32.75 1.5,33.75 2.5,33.75 3.5,33.75 4.5,33.75 8.5,34 11.5,34 14.5,34 17.5,34 20.5,34 23.5,34 26.5,34 7,37 10,37 13,37 16,37 19,37 22,37 25,37 34,37 37,37 40,37 43,37 46,37 49,37 52,37 55,37 58,37 61,37 64,37 67,37 70,37 5.5,40 8.5,40 11.5,40 14.5,40 17.5,40 20.5,40 23.5,40 26.5,40 29.5,40 35.5,40 38.5,40 41.5,40 44.5,40 47.5,40 50.5,40 53.5,40 56.5,40 59.5,40 62.5,40 65.5,40 68.5,40 71.5,40 77.5,40 10,43 13,43 16,43 19,43 22,43 25,43 28,43 31,43 34,43 37,43 40,43 52,43 55,43 58,43 61,43 64,43 67,43
  other v4: 8.5,1.5 11,1.5 15,1.5 19,1.5 23,1.5 27,1.5 31,1.5 35,1.5 39,1.5 53,1.5 57,1.5 61,1.5 65,1.5 69,1.5 71.5,1.5 13,2.5 17,2.5 21,2.5 25,2.5 29,2.5 33,2.5 37,2.5 41,2.5 51,2.5 55,2.5 59,2.5 63,2.5 67,2.5 10,3.5 70,3.5 68,4.5 70.5,6 72,8 1.5,8.5 78.5,9 76,9.5 73.5,10 3,10.5 1.5,12.5 1.5,37.5 3,39.5 73.5,40 76,40.5 78.5,41 1.5,41.5 72,42 70.5,44 68,45.5 10,46.5 70,46.5 13,47.5 17,47.5 21,47.5 25,47.5 29,47.5 33,47.5 37,47.5 41,47.5 51,47.5 55,47.5 59,47.5 63,47.5 67,47.5 8.5,48.5 11,48.5 15,48.5 19,48.5 23,48.5 27,48.5 31,48.5 35,48.5 39,48.5 53,48.5 57,48.5 61,48.5 65,48.5 69,48.5 71.5,48.5
NetADC-CLK_1: CLK.1 U2.13 | length 11
  Top Layer w0.293: CLK.1 U2.13
NetADC-D0_1: 0.1 U2.28 | length 5.3
  Top Layer w0.293: 0.1 U2.28
NetADC-D1_1: 1.1 U2.27 | length 7.3
  Top Layer w0.293: 1.1 U2.27
NetADC-D2_1: 2.1 U2.26 | length 9.3
  Top Layer w0.293: 2.1 U2.26
NetADC-D3_1: 3.1 U2.25 | length 11.3
  Top Layer w0.293: 3.1 18.301,15.771 cw(c18.25,15.25) 18.306,15.771 U2.25
NetADC-D4_1: 4.1 U2.24 | length 13.3
  Top Layer w0.293: 4.1 16.301,16.771 cw(c16.25,16.25) 16.313,16.77 U2.24
NetADC-D5_1: 5.1 U2.19 | length 7.3
  Top Layer w0.293: 5.1 U2.19
NetADC-D6_1: 6.1 U2.18 | length 9.3
  Top Layer w0.293: 6.1 U2.18
NetADC-D7_1: 7.1 U2.17 | length 11.3
  Top Layer w0.293: 7.1 U2.17
NetADC-D8_1: 8.1 U2.16 | length 13.3
  Top Layer w0.293: 8.1 16.301,21.771 cw(c16.25,21.25) 16.31,21.77 U2.16
NetADC-D9_1: 9.1 U2.15 | length 15.4
  Top Layer w0.293: 9.1 14.301,22.771 cw(c14.25,22.25) 14.316,22.77 U2.15
NetBDC1_3: BDC1.3 R5.1 | length 1.5
  Top Layer w0.293: R5.1 BDC1.3
NetC12_2: C12.2 U2.3 | length 6.5
  Top Layer w0.293: U2.3@33.359,14.188 C12.2
NetC13_2: C13.2 U2.4 | length 6.3
  Top Layer w0.293: U2.4@33.348,14.811 C13.2
NetC14_2: C14.2 U2.5 | length 6.2
  Top Layer w0.293: U2.5@33.322,15.45 C14.2
NetC15_2: C15.2 U2.6 | length 6.3
  Top Layer w0.293: U2.6@33.332,16.089 C15.2
NetMX-EN_1: MXEN.1 U7.3 | length 4.5
  Top Layer w0.293: MXEN.1 U7.3@53.897,18.549
NetPA-SP1_1: SP1.1 U8.6 | length 6
  Top Layer w0.293: U8.6 41.75,28.963 ; 41.75,28.962 ccw(c42.042,28.992) 41.88,28.748 SP1.1
NetPA-SP2_1: SP2.1 U8.7 | length 6.7
  Top Layer w0.293: U8.7@42.009,31.191 42.467,29.612 ccw(c42.749,29.694) 42.6,29.441 SP2.1
NetQ_1: Q.1 R6.1 R11.2 | length 6.7
  Top Layer w0.293: Q.1 38.725,28.625 ; R6.1 38.725,28.625 ; R11.2 38.725,28.625
NetR8_1: R8.1 R9.1 | length 2
  Top Layer w0.293: R9.1 27.379,24.37 ccw(c27.389,24.644) 27.395,24.37 R8.1
NetR9_2: R9.2 R10.2 | length 2
  Top Layer w0.293: R10.2 26.605,25.13 cw(c26.611,24.856) 26.621,25.13 R9.2
NetR12_1: R12.1 U7.10 | length 4.5
  Top Layer w0.293: U7.10@56.103,18.549 R12.1
NetR13_2: R13.2 U4.1 | length 2.5
  Top Layer w0.293: R13.2 U4.1
NetR14_1: R14.1 U2.14 | length 2.1
  Top Layer w0.293: U2.14 R14.1
NetU4_4: U4.4 U5.1 | length 5.7
  Top Layer w0.293: U5.1@61.15,18.5 65.378,18.499 cw(c65.379,18.206) 65.586,18.414 U4.4
RF-LO-DN: C18.1 U7.2 | length 3.7
  Top Layer w0.293: C18.1 53,21.106 ccw(c53.293,21.106) 53.068,20.919 U7.2@54.725,18.93
RF-LO-DNC: C18.2 U6.3 | length 3.3
  Top Layer w0.293: C18.2 53,24.773 cw(c53.293,24.773) 53.219,25.057 ; 53.219,25.057 U6.3
RF-LO-DP: C19.1 U7.1 | length 3.7
  Top Layer w0.293: U7.1@55.276,18.931 56.932,20.919 ccw(c56.707,21.106) 57,21.106 C19.1
RF-LO-DPC: C19.2 U6.4 | length 3.3
  Top Layer w0.293: U6.4 56.781,25.057 cw(c56.707,24.773) 57,24.773 C19.2
RF-LO-UB: BDC1.4 U6.1 | length 4.3
  Top Layer w0.293: U6.1@54.5,26.692 BDC1.4
RF-RX-LMN: U5.4 U7.8 | length 4
  Top Layer w0.293: U7.8 U5.4
RF-RX-LMP: U5.3 U7.9 | length 4
  Top Layer w0.293: U7.9 U5.3
RF-RX-LNE: SRx.1 U4.3 | length 5.9
  Top Layer w0.293: U4.3@67.563,16.5 73.5,16.5
RF-TX-BDC: BDC1.1 C5.2 | length 4
  Top Layer w0.293: C5.2 BDC1.1
RF-TX-BDP: C5.1 U8.13 | length 4.5
  Top Layer w0.293: U8.13 C5.1
RF-TX-CWC: C9.2 U8.3 | length 3.5
  Top Layer w0.293: C9.2 U8.3
RF-TX-CWP: C9.1 U3.16 | length 3.5
  Top Layer w0.293: U3.16 C9.1
RF-TX-LNE: BDC1.2 STx.1 | length 5.5
  Top Layer w0.293: BDC1.2 73.5,33.5
pads on no net: U3.1 U3.2 U3.3 U3.4 U3.5 U3.6 U3.7 U3.8 U3.9 U3.10 U3.11 U3.12 U3.13 U3.14 U3.17 U3.18 U3.19 U3.21 U3.23 U3.24 U4.7 U5.6 U6.6 U7.11 U8.1 U8.10 U8.21
copper on no net: | length 30.9
  Top Layer w0.2: 51.565,5.889 51.565,7.706 ccw(c53.182,7.706) 52.039,6.564 52.048,6.554 cw(c50.905,5.411) 52.522,5.411 52.522,8.185 ; 53.478,5.411 53.478,8.185 ; 53.478,5.595 ccw(c51.845,5.595) 53,6.75 cw(c54.155,7.905) 52.522,7.905 ; 53.478,7.905 53.478,8.185 ; 54.435,7.706 54.435,5.889 ccw(c53.049,5.889) 54.029,6.869 53.956,6.941 cw(c55.111,8.096) 53.478,8.096 53.478,8.185 ; 52.522,7.905 52.522,8.185 ; 52.522,7.905 52.522,8.185 ; 50.991,5.962 ccw(c51.628,5.962) 51.178,5.511 ccw(c52.344,6.678) 52.344,5.028 52.522,5.028 53.656,5.028 ccw(c53.656,6.678) 54.822,5.511 ccw(c54.372,5.962) 55.009,5.962 55.009,6.846 55.009,7.634 ccw(c54.372,7.634) 54.822,8.084 ccw(c53.656,6.918) 53.656,8.567 52.522,8.567 52.344,8.567 ccw(c52.344,6.918) 51.178,8.084 ccw(c51.628,7.634) 50.991,7.634 50.991,6.75 50.991,5.962

## Polygon pours and split planes (outlines as drawn)
GND on Top Layer "NONET_L-01_P-001" (solid, pour order 0): 0,46 0,4 73,4 73,46
GND on Layer 1 "NONET_L-01_P-001" (solid, pour order 2): 0,50 80,50 80,0 0,0
3V3A on Layer 2 "NONET_L-01_P-001" (solid, pour order 3): 0,50 80,50 80,0 0,0

## Keep-outs
Top Layer:
  region: 71.5,17.75 73,18 73,15 71.5,15.25
  region: 71.5,34.75 73,35 73,32 71.5,32.25
  lines w2: 32.5,33.5 40.5,33.5 54.5,33.5 54.5,32.25 ; 34,18 53.75,18 ; 50,18.5 54.243,22.743 ; 53,23.5 53,25 ; 53,25.25 54.25,26.5 ; 53.445,25.695 54.5,26.75 ; 54,25.5 53,24.5 53,21.5 53,21 55,19 57,21 57,24.25 ; 54.5,17.25 60.5,17.25 ; 54.5,17.75 60.5,17.75 ; 54.939,26.561 56,25.5 ; 55,22 55,23.5 ; 56.757,22.993 61,18.75 ; 57,24.5 56,25.5 ; 60.5,18.5 60.5,17.25 ; 60.75,18.5 61.75,18.5 60.5,17.25 ; 61.25,18.5 65.5,18.5 66.561,17.439 ; 66.5,17.5 67.561,16.439 ; 67.5,16.5 72,16.5 ; 67.5,29 67.5,32.25 ; 71.75,33.5 67.5,33.5 67.5,32.25 ; 54.5,32.25 54.5,25.5 56,25.5 ; 54.5,32.25 67.5,32.25

## Other copper
Top Layer:
  region net GND: 4,4 14,4 cw(c14,14) 4,14
  region net GND: 62.3,46 cw(c62.3,35.3) 73,35.3 80,35.3 80,46
  region net GND: 4,46 14,46 ccw(c14,36) 4,36
  region net GND: 62.3,4 ccw(c62.3,14.7) 73,14.7 80,14.7 80,4
  region net GND: 76,46 80,46 80,41.5 76,41.5
  region net GND: 80,46 80,50 0,50 0,46
  region net GND: 4,46 0,46 0,36 4,36
  region net GND: 4,4 0,4 0,14 4,14
  region net GND: 80,4 80,0 0,0 0,4
  text "csw.cx" at 55.863,6.083 h2
Bottom Layer:
  region net GND: 62.3,46 cw(c62.3,35.3) 73,35.3 80,35.3 80,46
  region net GND: 4,46 14,46 ccw(c14,36) 4,36
  region net GND: 62.3,4 ccw(c62.3,14.7) 73,14.7 80,14.7 80,4
  region net GND: 4,4 14,4 cw(c14,14) 4,14
  region net GND: 80,46 80,50 0,50 0,46
  region net GND: 4,46 0,46 0,36 4,36
  region net GND: 80,4 80,0 0,0 0,4
  region net GND: 4,4 0,4 0,14 4,14

## Silkscreen, mask and mechanical layers (free items; w line width, h text height)
Top Overlay:
  lines w0.3: 8.837,43.416 10.462,42.053 12.087,40.689 13.45,42.314 14.814,43.939 16.439,42.576 18.064,41.212 19.267,42.646 ; 9.214,41.941 10.353,43.298 11.978,41.934 13.603,40.571 14.966,42.196 16.33,43.821 17.955,42.457 19.58,41.094
  text "mashiro FS" at 8.5,37.921 h3.2
  text "RF Front End" at 7.503,35.433 h3.2
  text "GND" at 3.724,25.25 h1
  text "3V3" at 0.776,23.75 h1
  text "ADC" at 9.7,19.5 h1
  text "2020 10 R1" at 5.5,9.68 h3.2
  text "Prototype VA" at 7.75,6.958 h3.2
  text "Preliminary Design" at 11.75,4.443 h3.2
Bottom Overlay:
  lines w0.174: 36.121,9.748 36.121,8.096 cw(c37.38,8.096) 36.49,8.986 36.556,9.052 ccw(c35.506,10.102) 36.99,10.102 36.99,10.182 ; 36.99,7.661 36.99,10.182 ; 36.99,7.829 cw(c38.474,7.829) 37.425,8.878 ccw(c36.376,9.928) 37.86,9.928 ; 36.99,9.928 36.99,10.182 ; 38.729,8.096 38.729,9.748 cw(c37.26,9.748) 38.299,8.709 38.29,8.7 ccw(c39.329,7.661) 37.86,7.661 37.86,10.182 ; 37.86,9.928 37.86,10.182 ; 37.86,9.928 37.86,10.182 ; 35.6,8.162 ccw(c36.178,8.162) 35.769,7.753 ccw(c36.829,8.813) 36.829,7.314 37.86,7.314 38.021,7.314 ccw(c38.021,8.813) 39.081,7.753 ccw(c38.672,8.162) 39.25,8.162 39.25,8.878 39.25,9.682 ccw(c38.672,9.682) 39.081,10.091 ccw(c38.021,9.031) 38.021,10.53 37.86,10.53 36.829,10.53 ccw(c36.829,9.031) 35.769,10.091 ccw(c36.178,9.682) 35.6,9.682 35.6,8.965 35.6,8.162
  lines w0.32: 8.87,39.78 10.495,41.143 12.12,42.507 13.484,40.882 14.847,39.257 16.472,40.62 18.098,41.984 19.236,40.627 ; 9.183,41.332 10.386,39.898 12.011,41.261 13.636,42.625 15,41 16.364,39.375 17.989,40.739 19.614,42.102
  text "cs mashiro" at 20.125,36.642 h3.2
  text "Criterion" at 35,9 h1.2
  text "TCS 2020 10" at 23.652,7 h1.5
  text "Signalworks" at 35,7 h1.2
  text "MASSIAN / SYSTEMS" at 64,5.75 h3
  text "www.csw.cx" at 37.132,5.5 h1
Top Solder:
  drawing of 59 lines, arcs and shapes, not listed
  text "csw.cx" at 55.863,6.083 h2
Bottom Solder:
  region: 62.3,4 ccw(c62.3,14.7) 73,14.7 80,14.7 80,4
  region: 62.3,46 cw(c62.3,35.3) 73,35.3 80,35.3 80,46
  region: 4,46 14,46 ccw(c14,36) 4,36
  region: 4,4 14,4 cw(c14,14) 4,14
  region: 80,46 80,50 0,50 0,46
  region: 80,4 80,0 0,0 0,4
  region: 4,46 0,46 0,36 4,36
  region: 4,4 0,4 0,14 4,14
Mechanical 1:
  the board outline again, w0.1